# Altium PCB PCB1.PcbDoc (part 2 of 2)
Units mil, origin at the board's own origin, x right, y up, seen from the top; angles counter-clockwise.
Board outline 2698.82 x 2101.51 mil, 2 copper layers (Top Layer, Bottom Layer); 61 components, 56 nets, 231 pads, 29 vias.
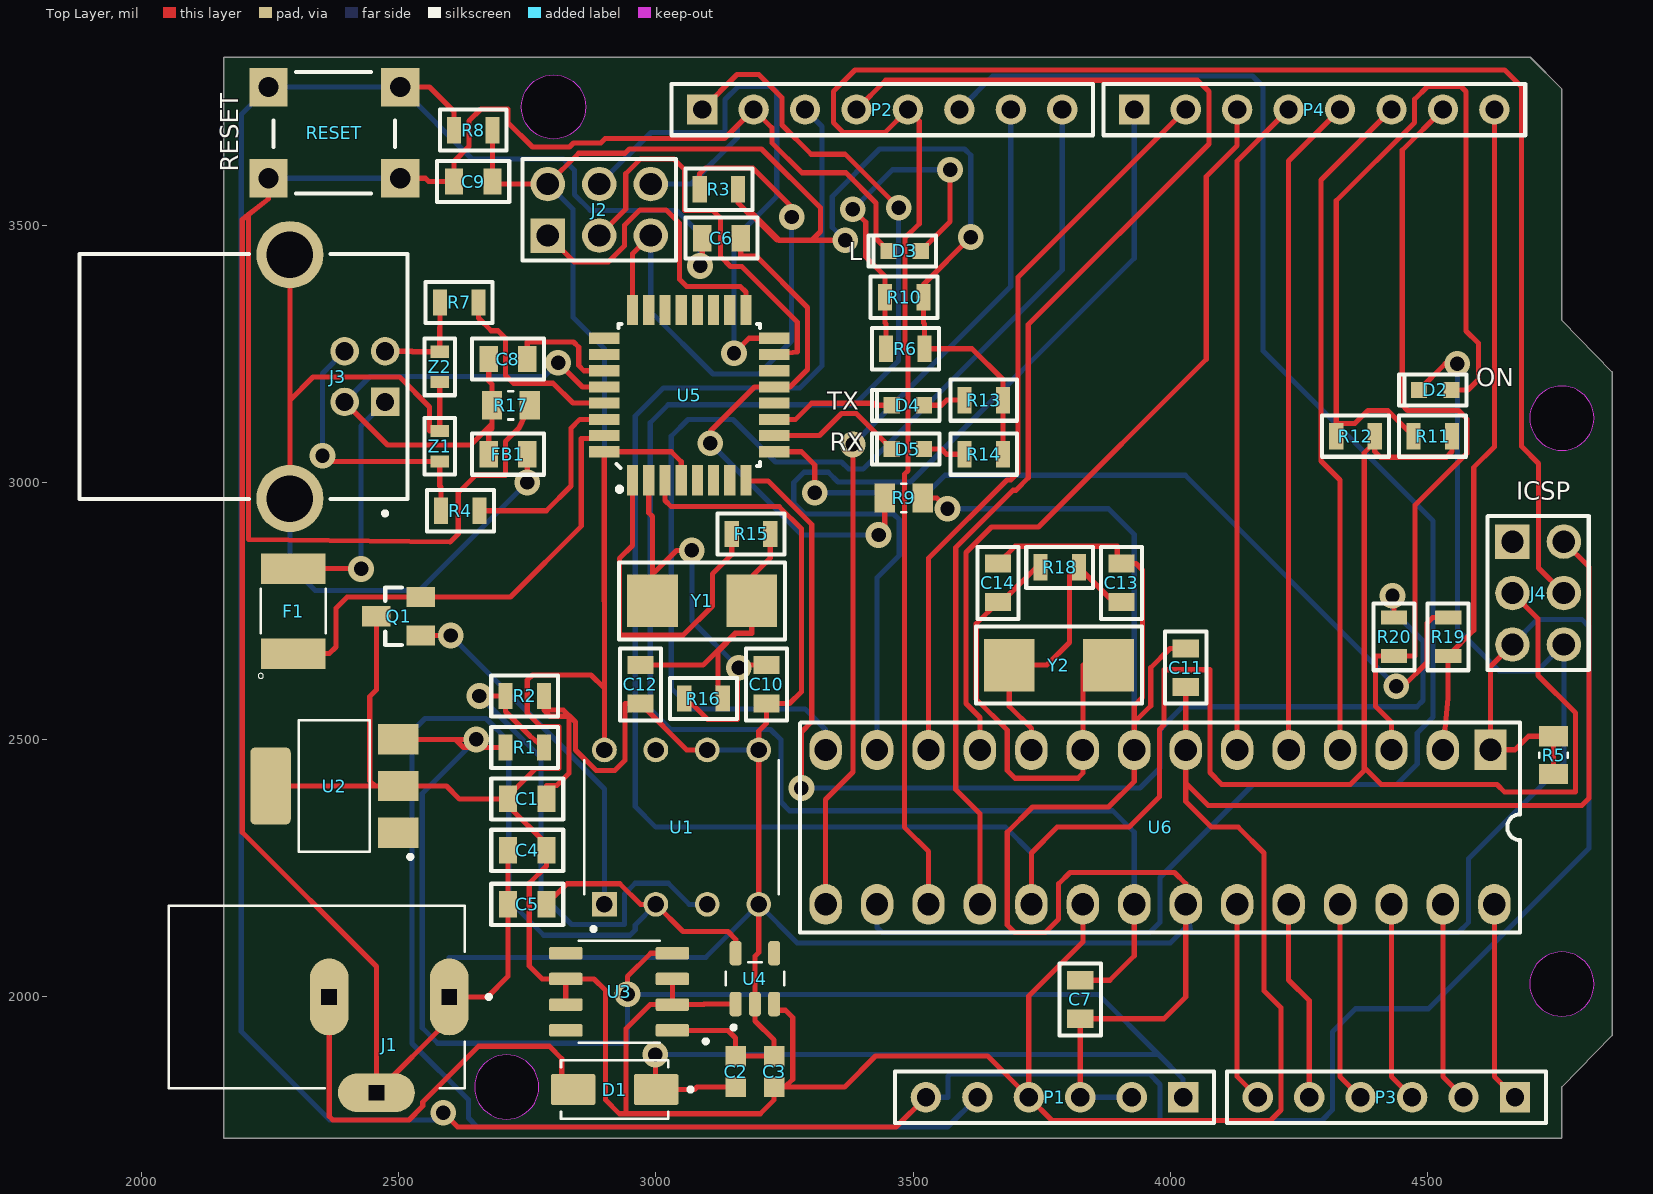
[diagram p0: Top Layer view]

## Via types
v1: diameter 50, hole 28, Top Layer to Bottom Layer, 29 vias

## Nets (pads, with @x,y where several pads share a name; then routed paths per layer and width w, separated by ;. In a path a pad name is that pad's centre, name@x,y a point inside that pad or via, vN(x,y) a via of type N, cw(c..) or ccw(c..) an arc to the next point about the centre after c; other vN are vias at no path point) (continued)
LM358GND: C1.2 C2.1 C3.1 C4.1 C5.1 C7.2 C9.1 C10.1 C11.1 C12.1 C13.1 C14.1 D2.1 D3.1 J1.1 J1.3 J2.6 J4.6 P1.2 P1.3 P2.2 R2.1 R9.2 R17.2 RESET.3 RESET.4 U1.4 U1.5 U1.6 U3.1 U4.2 U5.3 U6.8 U6.22 | length 15513.7
  Top Layer w10: RESET.4 2247.05,3551 2208,3520.4 ; RESET.3 2552,3591.42 2558.42,3585 C9.1 2607.6,3624 2637,3653.4 2637,3703 2660,3726 2712,3726 2712,3700 2760,3652 2832,3652 2840,3660 2893.07,3660 2901.53,3668.47 3133.47,3668.47 P2.2 3225.47,3689.53 3225.47,3660.47 3283.94,3602 3369.42,3602 3428,3543.42 3428,3474.01 D3.1 ; C4.1 C5.1 2712.6,2040 2672.6,2000 J1.1 2598.46,1955.51 J1.3@2457,1814.05 ; R17.2 2734.91,3107 2707.91,3080 2707.91,3014 2650,3014 2616,2980 2616,2900 2600,2884 2208,2889 2208,3520.4 ; R2.1 2782.4,2557.95 ; C1.2 2787.4,2411.11 2807.4,2411.11 2831.18,2434.89 2831.18,2545.59 ; U5.3 3017.76,2965.24 3030,2953 3240,2953 3283,2910 3283,2593.2 3260,2570.2 C10.1 3215,2532 3200,2517 U1.5 U1.4 3200,2086.4 3192.6,2079 U4.2 3192.6,1953.4 3230,1916 C3.1 C2.1 3155,1920 3140,1935 U3.1 ; U1.6 3060.2,2480 C12.1 2940,2570.2 2940,2460 2920,2440 2884,2440 2844,2480 2844,2534.59 2833,2545.59 2831.18,2545.59 ; R9.2 3546,2970 v1(3567,2949) ; C14.1 3698.6,2876 3897,2876 3897,2842.4 C13.1 3933.6,2842.4 3946,2830 3946,2582 3930,2566 3930,2534 ; P1.3 C7.2 3987.6,1957.6 4030,2000 U6.22 4030,2220 4008,2242 3805,2242 3783,2220 3783,2151.29 3757,2125.29 3697.71,2125.29 3683,2140 3683,2320 3732,2369 3880,2369 3930,2419 U6.8 3930,2534 ; C11.1 3999.4,2677.4 3962,2640 3962,2566 3930,2534 ; D2.1 4534.5,3231 v1(4558,3231) ; 2208,3520.4 2196,3511 2196,2320 2457,2059 J1.3@2457,1814.05 ; J1.3@2457,1814.05 J1.3 2457,1813.78 J1.3@2457,1814.05 ; 2782.4,2557.95 2820,2557.95 2831.18,2546.76 2831.18,2545.59 ; 2782.4,2557.95 2794.75,2545.59 2831.18,2545.59
  Bottom Layer w10: RESET.4 RESET.3 ; J1.1 2598.46,2076.93 3096.93,2076.93 U1.4 3275,2105 4000,2105 4030,2135 U6.22 4040,2125 4560,2125 4580,2145 4580,2269 4765,2454 J4.6 4714,2634 4639,2634 4558,2715 v1(4558,3231) ; J2.6 3068.44,3580 3158.44,3670 3158.44,3693.44 P2.2 ; U1.6 U1.5 ; v1(3567,2949) 3880,2949 3930,2899 U6.8 ; P1.3 P1.2
LM358VCC: C1.1 C3.2 C4.2 C9.2 C11.2 J2.2 J4.2 P1.4 Q1.3 R3.2 R6.2 R8.1 R10.2 R13.2 R14.2 U1.8 U2.2 U2.4 U3.2 U3.3 U3.6 U3.7 U4.1 U4.3 U5.4 U5.32 U6.7 U6.20 | length 11241.5
  Top Layer w10: U2.4 2454,2410 ; Q1.3 2457,2740 2457,2597 2444,2584 2444,2420 2454,2410 ; R8.1 C9.2 2682.4,3580 J2.2 2850,3640 2940,3640 2948.47,3648.47 3205.47,3648.47 3320,3533.94 3320,3487.94 3303.3,3471.24 3240,3471.24 ; U3.7 U3.6 ; U1.8 2900,2600 ; U3.3 U3.2 ; U5.4 3049.25,3040.51 3030,3059.76 U5.32 2899.65,2769.35 2900,2769 2900,2600 ; U4.1 3094.18,1986.18 3093,1985 U3.2 ; R3.2 3160,3543 3180,3523 3184,3523 ; U4.3 3230,1974 3252,1974 3266,1960 3266,1840 3251.12,1825.12 ; v1(3368,3471) 3240,3471 3240,3471.24 ; v1(3612,3477) 3520,3385 R10.2 3520,3310.4 3522.4,3308 R6.2 3614.8,3260 3674.8,3200 R13.2 R14.2 ; U6.20 3830,2107 3725,2002 P1.4 ; C11.2 U6.7 4030,2416 ; J4.2 4814,2836 4814,2386.31 4800,2372.31 4073.69,2372.31 4030,2416 ; 2454,2410 U2.2 2593,2410 2618,2385 C1.1 ; C1.1 2712.6,2390 2766.6,2444 2811.18,2444 2811.18,2525.59 2776.41,2525.59 2750,2552 2750,2616 2760,2626 2874,2626 2900,2600 ; C1.1 2712.6,2371.8 2787.4,2297 C4.2 2787.4,2254.4 2754,2221 2754,2060 2779,2035 U3.6 ; U3.6 2880,2035 2902,2013 2902,1800 2929,1773 2942,1773 ; 2942,1773 3203,1773 3230,1800 C3.2 3251.12,1825.12 ; 2942,1773 2942,1938 2989,1985 U3.2 ; 3184,3523 3188,3523 3239.76,3471.24 ; 3184,3523 3235.76,3471.24 3239.76,3471.24 ; 3239.76,3471.24 3240,3471.24 ; 3251.12,1825.12 3367,1825.12 3426.88,1885 3645,1885 P1.4 ; P1.4 3770,1760 4195,1760 4215,1780 4215,1979 4182,2012 4182,2280 4132,2330 4080,2330 4030,2380 4030,2416
  Bottom Layer w10: J2.2 2839,3531 2839,3321 2900,3260 U1.8 ; v1(3368,3471) 3343,3496 3343,3556 3435,3648 3600,3648 3612,3636 v1(3612,3477)
NetButton1_1: C6.1 J4.5 P1.6 R5.1 R5.2 R8.2 RESET.1 RESET.2 U6.1 | length 7317.8
  Top Layer w10: RESET.2 2560,3768.58 2607.6,3720.98 R8.2 ; v1(2587,1775) 2615,1747 3467,1747 P1.6 ; v1(3086,3421) 3090.2,3425.2 C6.1 ; J4.5 4622.52,2642.52 U6.1 4670,2480.39 4696.42,2506.81 R5.1 R5.2
  Bottom Layer w10: v1(2587,1775) 2573,1761 2366,1761 2194,1933 2194,3715.53 RESET.1 RESET.2 2642.53,3629 2820,3629 2841.53,3607.47 2841.53,3559.92 2872.46,3529 3040,3529 3086,3483 v1(3086,3421) ; P1.6 3568,1805 3568,1846 3572,1850 3960,1850 3980,1830 3980,1760 4295,1760 4315,1780 4315,1932 4360,1977 4502,1977 4814,2289 4814,2720 4800,2734 4714,2734 J4.5
NetC6_2: C6.2 R9.1 U5.13 | length 1066.7
  Top Layer w10: v1(3106,3076) 3106,3100 3191.75,3185.75 U5.13 3260.75,3185.75 3294.88,3219.88 3294.88,3340.12 3195,3440 3165,3440 C6.2 ; v1(3433,2898) 3445,2910 R9.1
  Bottom Layer w10: v1(3106,3076) 3284,2898 v1(3433,2898)
NetC8_2: C8.2 U5.27 | length 226.7
  Top Layer w10: C8.2 2750,3273 2840,3273 2850,3263 2850,3227.24 2860,3217.24 U5.27
NetC10_2: C10.2 R16.2 U5.2 Y1.2 | length 897.6
  Top Layer w10: U5.2 2986.26,2941 2993.54,2933.72 2993.54,2821.54 ; Y1.2 2993.54,2821.54 ; R16.2 3055.2,2568 3072,2568 3101,2539 3159,2539 3159,2624 v1@3180,2645 ; v1(3070,2868) 3040,2868 2993.54,2821.54 ; v1(3161,2640) 3166,2645 v1@3180,2645 ; C10.2 v1@3180,2645
  Bottom Layer w10: v1(3070,2868) 3070,2731 v1(3161,2640)
NetC12_2: C12.2 R15.1 R16.1 Y1.1 | length 600.7
  Top Layer w10: C12.2 3092,2645 3154.05,2707.05 3156.46,2707.05 ; R16.1 3130,2591.88 3121,2591.88 3121,2671.59 3156.46,2707.05 ; R15.1 3222.4,2852.95 3186.46,2817 Y1.1 3186.46,2707.05 3156.46,2707.05
NetC13_2: C13.2 R18.2 U6.10 Y2.2 | length 592.8
  Top Layer w10: U6.10 3730,2522.09 3687.09,2565 Y2.2 3760,2645 3804,2689 3804,2823 3822.4,2823 R18.2 3889.8,2767.6 C13.2
NetC14_2: C14.2 R18.1 U6.9 Y2.1 | length 897.8
  Top Layer w10: R18.1 3739.4,2835 3672,2767.6 C14.2 3622.87,2725.47 3622.87,2578.82 3683,2518.69 3683,2440 3698,2425 3820,2425 3830,2435 U6.9 3830,2645 Y2.1
NetD1_A: D1.A J1.2 | length 843.1
  Top Layer w10: J1.2 2365,1768 2372,1761 2520,1761 2547,1788 2547,1796 2655,1904 2793,1904 2817,1880 2817,1820 D1.A
NetD2_2: D2.2 R11.2 R12.2 | length 1644.3
  Top Layer w10: R12.2 R12.2@4322.6,3115 ; R11.2 4422.6,3140 4384,3140 4359,3115 R12.2@4322.6,3115 ; D2.2 4578.88,3180 4598.88,3200 4598.88,3270.75 4575,3294.63 4575,3760 4565,3770 4500,3770 4475,3745 4475,3700 4322.6,3547.6 R12.2@4322.6,3115
NetD3_2: D3.2 R6.1 R10.1 | length 700.3
  Top Layer w10: v1(3383,3531) 3408,3506 3408,3438.2 3445.2,3401 R10.1 3445.2,3310.4 3447.6,3308 R6.1 ; D3.2 3572,3507 v1(3572,3608)
  Bottom Layer w10: v1(3383,3531) 3460,3608 v1(3572,3608)
NetD4_1: D4.1 U5.11 | length 242.7
  Top Layer w10: U5.11 3271.76,3122.76 3303,3154 3423,3154 3427,3150 D4.1
NetD4_2: D4.2 R13.1 | length 82.6
  Top Layer w10: D4.2 3555,3150 3565,3160 R13.1
NetD5_1: D5.1 U5.10 | length 274.4
  Top Layer w10: U5.10 3318.26,3091.26 3361,3134 3389.5,3134 D5.1
NetD5_2: D5.2 R14.1 | length 82.6
  Top Layer w10: D5.2 3555,3065 3565,3055 R14.1
NetF1_2: F1.2 J3.1 | length 476.2
  Top Layer w10: F1.2 2426.32,2832.68 v1(2427,2832)
  Bottom Layer w10: v1(2427,2832) 2427,3109.83 J3.1
NetJ2_1: J2.1 U5.17 | length 636.4
  Top Layer w10: J2.1 2841,3429 2908,3429 2939,3460 2939,3500 2969,3530 3020,3530 3046,3504 3046,3395 3060,3381 3164.24,3381 3175.24,3370 U5.17
NetJ2_3: J2.3 U5.15 | length 810.2
  Top Layer w10: J2.3 2941.42,3531.42 2941.42,3600 2969.89,3628.47 3035.53,3628.47 3056,3608 3056,3529 3110,3529 3126,3513 3126,3439 3145,3420 3167,3420 3274.88,3312.12 3274.88,3254 U5.15
NetJ2_4: J2.4 U5.16 | length 1099.2
  Top Layer w10: v1(3152,3251) 3181.24,3280.24 U5.16
  Bottom Layer w10: J2.4 2990.47,3680.47 3134.53,3680.47 3134.53,3744.53 3160,3770 3225,3770 3235,3760 3235,3556.04 3152,3473.04 v1(3152,3251)
NetJ2_5: J2.5 R3.1 U5.24 | length 1163.3
  Top Layer w10: U5.24 2954.76,3444.76 J2.5 ; R3.1 3085.2,3600 3096.2,3611 3189,3611 3263.96,3536.04 v1(3263.96,3516.04)
  Bottom Layer w10: J2.5 2990,3332 3111,3211 3200,3211 3263.96,3274.96 v1(3263.96,3516.04)
NetJ4_3: J4.3 P2.3 R11.1 R12.1 U6.19 | length 5570.5
  Top Layer w10: U6.19 3730,2280 3780,2330 3920,2330 3979,2389 3979,2520 3988,2529 3988,2636 4077,2636 4077,2436 4100,2413 4350,2413 4377,2440 4377,2446 ; R12.1 R12.1@4397.4,3078 ; R11.1 4547.4,3060 4536.4,3049 4408.4,3049 4397.4,3060 R12.1@4397.4,3078 ; J4.3 4715,2735 4715,2625 4788,2552 4788,2398 4650,2398 4635,2413 4410,2413 4377,2446 ; 4377,2446 4377,3057.6 R12.1@4397.4,3078
  Bottom Layer w10: P2.3 3323,3692 3323,3227 3280,3184 3015,3184 2960,3129 2960,2370 3000,2330 3680,2330 3730,2280 U6.19
NetJ4_4: J4.4 P2.5 U6.17 | length 4209.5
  Top Layer w10: U6.17 3530,2283 3483,2330 3483,3016 3490,3023 3490,3254 3484,3260 3484,3475 3512,3503 3512,3703 P2.5 3445,3680 3365,3680 3345,3700 3345,3760 3387,3802 4650,3802 4683,3769 4683,3070 4716,3037 4716,2834 J4.4
NetP2_4: P2.4 U6.18 | length 2524.3
  Top Layer w10: P2.4 3447,3782 4053,3782 4075,3760 4075,3658 3724,3307 3724,3009 3700,2985 3694.45,2985 3582.87,2873.43 3582.87,2403.13 3630,2356 U6.18
NetP2_6: P2.6 U6.16 | length 3378.1
  Bottom Layer w10: U6.16 3430,2135 3440,2125 3960,2125 3980,2145 3980,2232 4161,2413 4440,2413 4480,2453 4480,2513 4511,2544 4511,2925 4180,3256 4180,3770 4160,3790 3655,3790 P2.6
NetP2_7: P2.7 U6.15 | length 1694.1
  Top Layer w10: U6.15 3330,2384 3383,2437 v1(3383,3074)
  Bottom Layer w10: v1(3383,3074) 3690,3381 P2.7
NetP2_8: P2.8 U6.14 | length 2149
  Bottom Layer w10: U6.14 3330,2520 3290,2560 3070,2560 3030,2600 3030,3090 3062.65,3122.65 3149.74,3122.65 3232.38,3040 3361,3040 3375,3026 3403,3026 3790,3413 P2.8
NetP3_1: P3.1 U6.28 | length 391.6
  Top Layer w10: U6.28 4630,1845 P3.1
NetP3_2: P3.2 U6.27 | length 391.6
  Top Layer w10: U6.27 4530,1845 P3.2
NetP3_3: P3.3 U6.26 | length 391.6
  Top Layer w10: U6.26 4430,1845 P3.3
NetP3_4: P3.4 U6.25 | length 391.6
  Top Layer w10: U6.25 4330,1845 P3.4
NetP3_5: P3.5 U6.24 | length 391.6
  Top Layer w10: U6.24 4230,2033 4270,1993 P3.5
NetP3_6: P3.6 U6.23 | length 391.6
  Top Layer w10: U6.23 4130,1845 P3.6
NetP4_1: P4.1 U6.13 | length 1871.4
  Bottom Layer w10: U6.13 3430,2815 3473,2858 3473,2928 3462,2939 3289,2939 3268,2960 3268,3000 3288,3020 3335,3020 3353.92,3001.08 3495.12,3001.08 3930,3435.96 P4.1
NetP4_2: P4.2 U6.12 | length 1456.6
  Top Layer w10: U6.12 3530,2852.62 3682.38,3005 3690,3005 3704,3019 3704,3399 P4.2
NetP4_3: P4.3 U6.11 | length 1528.3
  Top Layer w10: U6.11 3630,2543 3602.87,2570.13 3602.87,2864.08 3652.35,2913.55 3744,2913.55 4070,3239.55 4070,3595 4130,3655 P4.3
NetP4_4: P4.4 U6.6 | length 1286.4
  Top Layer w10: U6.6 4130,3625 P4.4
NetP4_5: P4.5 U6.5 | length 1286.4
  Top Layer w10: U6.5 4230,3625 P4.5
NetP4_6: P4.6 U6.4 | length 1317.1
  Top Layer w10: U6.4 4330,3005 4293,3042 4293,3588 P4.6
NetP4_7: P4.7 R20.2 U6.3 | length 1518.9
  Top Layer w10: U6.3 4430,2534 4399,2565 4399,2662.6 R20.2 4476,2662.6 4476,2956 4576.18,3056.18 4576.18,3123.75 4560,3139.93 4461.02,3139.93 4450.95,3150 4450.95,3645.95 P4.7
NetP4_8: P4.8 R19.2 U6.2 | length 1282.8
  Top Layer w10: U6.2 4540,2581 R19.2 4590,2712.6 4590,3029.41 4630,3069.41 P4.8
NetQ1_1: Q1.1 U1.1 | length 704.4
  Top Layer w10: Q1.1 v1(2601.4,2702.6)
  Bottom Layer w10: v1(2601.4,2702.6) 2900,2404 U1.1
NetR1_1: R1.1 R2.2 U1.3 | length 1050.1
  Top Layer w10: v1(2657,2585) R2.2 2707.6,2554.78 2755.21,2507.17 R1.1
  Bottom Layer w10: v1(2657,2585) 2777,2465 2777,2200 2836.02,2140.98 2939.02,2140.98 2939.02,2200.02 2960,2221 3024,2221 3065,2180 U1.3
NetR15_2: R15.2 U5.1 | length 672.5
  Top Layer w10: U5.1 2954.76,2877.76 2929,2852 2929,2703 3053,2703 3110,2760 3110,2822.4 3147.6,2860 R15.2
NetR19_1: R19.1 U5.9 | length 1658.2
  Top Layer w10: U5.9 3283,3059.76 3308.76,3034 v1(3308.76,2980) ; v1(4439,2604) 4453,2604 4499,2650 4499,2726.4 4510,2737.4 R19.1
  Bottom Layer w10: v1(3308.76,2980) 3527.95,2980 3561.95,3014 4029,3014 v1(4439,2604)
NetR20_1: R20.1 U5.8 | length 2279.7
  Top Layer w10: U5.8 3175.24,3003 3218.29,3003 3303,2918.29 3303,2535 3283,2515 v1(3283,2406) ; v1(4432,2780) 4435,2777 R20.1
  Bottom Layer w10: v1(3283,2406) 3941,2406 3980,2445 3980,2520 4024,2564 4479,2564 4491,2576 4491,2692 4432,2751 v1(4432,2780)
UGND: C8.1 FB1.2 J3.4 R17.1 U5.28 | length 1084.1
  Top Layer w10: J3.4 2478.57,3073 2640,3073 2681.38,3114.38 ; FB1.2 2675.2,3099 2681.38,3105.18 2681.38,3114.38 ; C8.1 2675.2,3197.18 2681.38,3191 R17.1 2681.38,3114.38 ; v1(2810,3233) 2857.25,3185.75 U5.28
  Bottom Layer w10: J3.4 2444.43,3206 2783,3206 v1(2810,3233)
USB_N: R4.2 U5.30 | length 381.7
  Top Layer w10: R4.2 2786.95,2945 2835.12,2993.17 2835.12,3105.59 2852.28,3122.76 U5.30
USB_P: R7.2 U5.29 | length 385.5
  Top Layer w10: R7.2 2655,3320 2680,3295 2693,3295 2708,3280 2708,3208 2723,3193 2800,3193 2838.75,3154.25 U5.29
USBVCC: F1.1 Q1.2 U5.31 | length 927.6
  Top Layer w10: F1.1 2365.32,2667.32 2378,2680 2378,2755.4 2400,2777.4 Q1.2 2717.4,2777.4 2855.12,2915.12 2855.12,3085.59 2881,3085.59 2881,3091.26 U5.31
USHILD: FB1.1 J3.S1 J3.S2 Z1.2 Z2.2 | length 1703.2
  Top Layer w10: J3.S2 2288.7,3160 ; J3.S1 2288.7,3160 ; Z2.2 Z1.2 2560,3100 2560,3147 2502,3205 2333.7,3205 2288.7,3160 ; v1(2750,3000) FB1.1
  Bottom Layer w10: J3.S2 2288.7,2839.3 2338,2790 2540,2790 v1(2750,3000)
VIN: C2.2 D1.C P1.1 R1.2 U2.3 U3.4 | length 3894.1
  Top Layer w10: U2.3 2610.55,2500.55 ; v1(2651,2500.55) 2610.55,2500.55 ; R1.2 2626.1,2485 2610.55,2500.55 ; v1(2945,2005) 2945,2040 2990,2085 U3.4 ; v1(2999,1888) 2999,1820 D1.C 3075,1820 3080.12,1825.12 C2.2
  Bottom Layer w10: v1(2651,2500.55) 2546,2395.55 2546,1940 2576,1910 2945,1910 v1(2945,2005) 3860,2005 3977,1888 ; v1(2999,1888) 3977,1888 ; P1.1 4025,1840 3977,1888
pads on no net: J4.1 U1.7 U2.1 U3.5 U3.8 U4.4 U5.5 U5.6 U5.7 U5.12 U5.14 U5.18 U5.19 U5.20 U5.21 U5.22 U5.23 U5.25 U5.26

## Polygon pours and split planes (outlines as drawn)
UGND on Bottom Layer "UGND_L02_P000" (solid, pour order 0): 2160.81,3826.57 2160.81,1725.81 2160,1725 4760,1725 4760,1825 4860,1925 4860,3215 4760,3315 4760,3765 4700,3825 2160,3825

## Silkscreen, mask and mechanical layers (free items; w line width, h text height)
Top Overlay:
  text "L" at 3375,3420 h60
  text "ON" at 4595,3175.5 h60
Mechanical 1:
  circle w0.5: c2801.18,3730 r62.5
  circle w0.5: c4761.18,3125 r62.5
  circle w0.5: c4761.18,2025 r62.5
  circle w0.5: c2710,1825 r62.5
  lines w0.5: 2160,1725 2160,3826.51 4699.58,3826.51 4761.18,3764.91 4761.18,3315 4858.82,3215 4858.82,1925 4761.18,1825 4761.18,1725 2160,1725